# Altium PCB Power_Embedded_Board.PcbDoc (part 3 of 3)
Units mil, origin at the board's own origin, x right, y up, seen from the top; angles counter-clockwise.
Board outline 8055 x 2985 mil, 4 copper layers (Top Layer, Ground, Battery Voltage, Bottom Layer), stack 30.634 mil thick; 155 components, 174 nets, 698 pads, 170 vias.
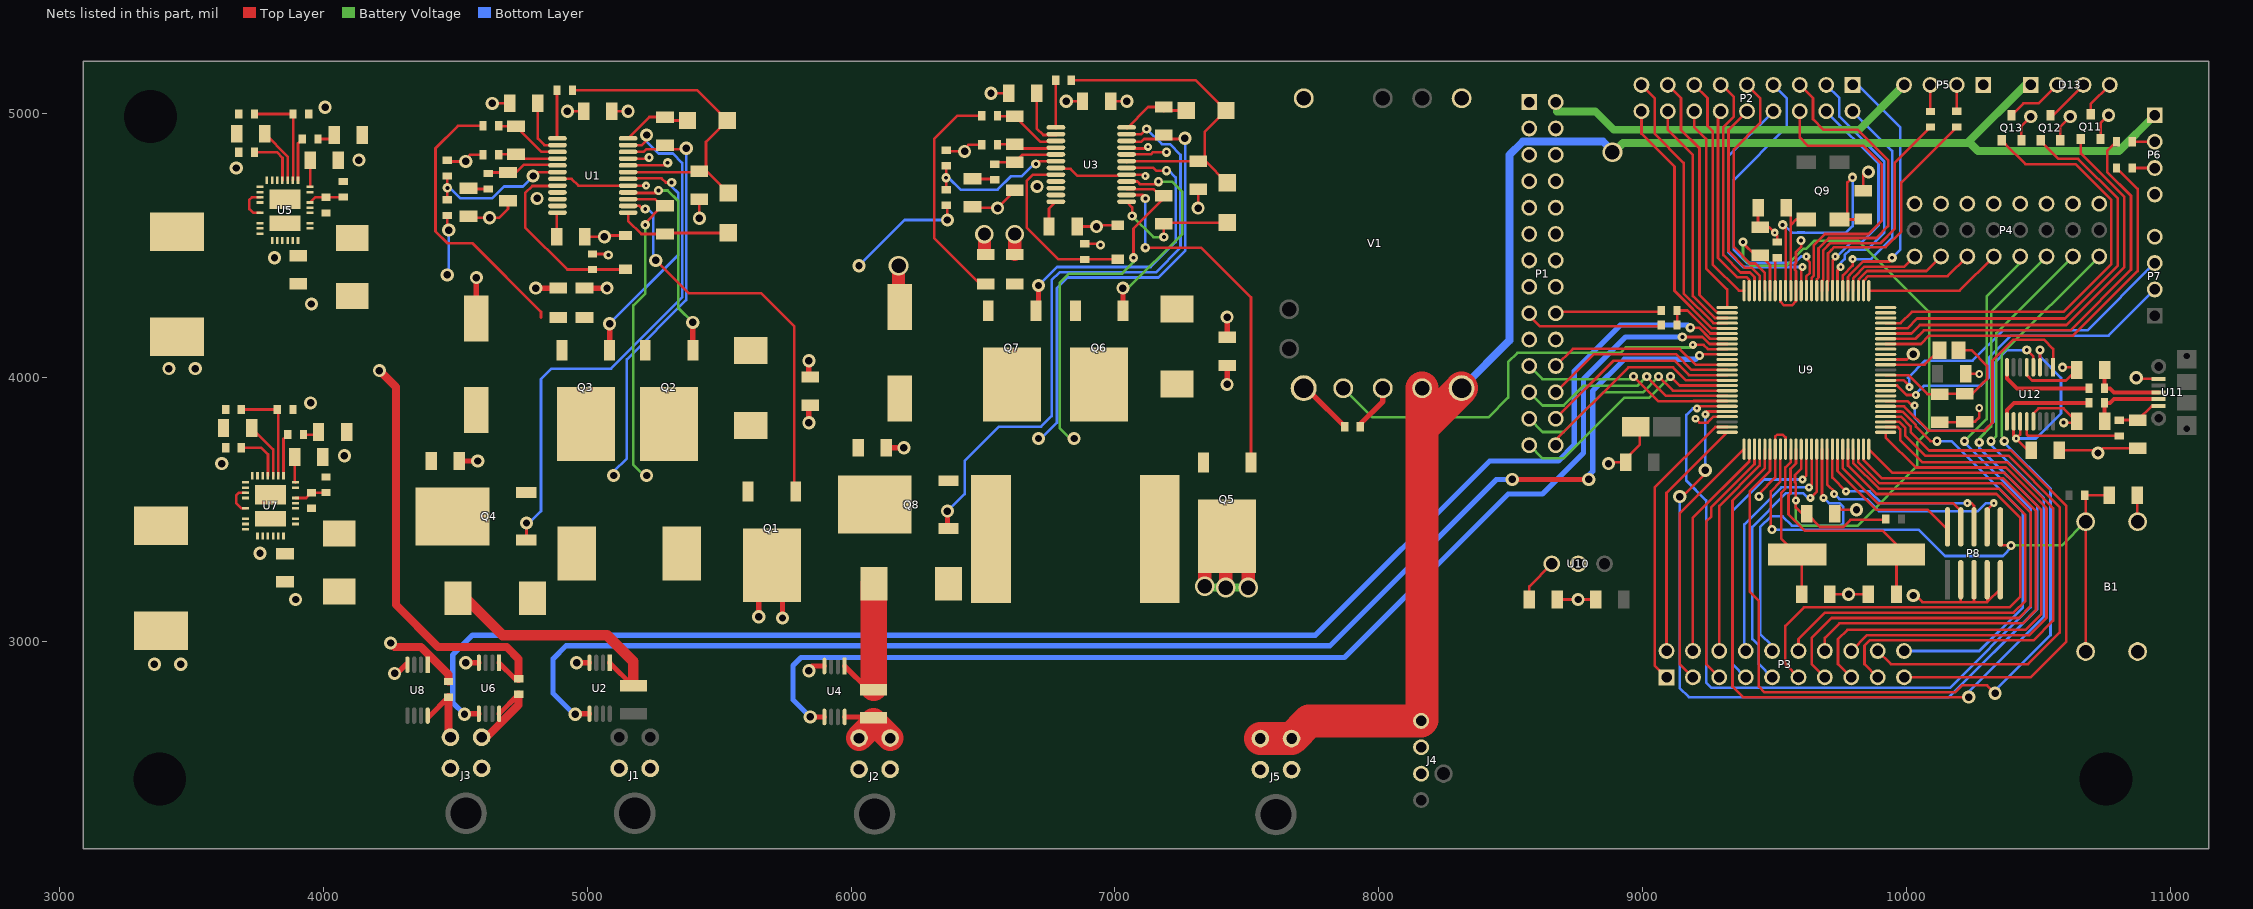
[diagram p4: the nets of this part, all layers, seen from the top]

## Via types
v1: diameter 50, hole 28, Top Layer to Bottom Layer, 89 vias
v2: diameter 35, hole 15, Top Layer to Bottom Layer, 45 vias
v3: diameter 30, hole 10, Top Layer to Bottom Layer, 26 vias
v4: diameter 75, hole 55, Top Layer to Bottom Layer, 5 vias
v5: diameter 30, hole 15, Top Layer to Bottom Layer, 2 vias
v6: diameter 70, hole 50, Top Layer to Bottom Layer, 2 vias
v7: diameter 34, hole 14, Top Layer to Bottom Layer, 1 vias

## Nets (pads, with @x,y where several pads share a name; then routed paths per layer and width w, separated by ;. In a path a pad name is that pad's centre, name@x,y a point inside that pad or via, vN(x,y) a via of type N, cw(c..) or ccw(c..) an arc to the next point about the centre after c; other vN are vias at no path point) (continued)
12V: D13.1 J4.4 J5.3 J5.4 P6.1 V1.7 V1.8 | length 5986.3
  Top Layer w10: J4.4@8159.96,2700 J4.4@8163.94,2703.98 ; 8163.94,3810 8163.94,3811.18
  Top Layer w125: J5.4@7550.94,2633.19 J5.3@7669.06,2633.19 7735.87,2700 J4.4@8159.96,2700 ; J4.4@8163.94,2703.98 8163.94,3810 ; V1.7@8163.94,3960.79 8163.94,3811.18 V1.8@8313.54,3960.79
  Battery Voltage w20: 10230,4890 10240,4890 ; D13.1@10450,5110 D13.1@10470,5110
  Battery Voltage w30: v4(8885,4855) 8885,4870 8895,4860 8925,4890 10230,4890 D13.1@10450,5110 ; 10240,4890 10270,4860 10805,4860 P6.1@10940,4995
  Bottom Layer w30: V1.8@8313.54,3960.79 8495,4142.24 8495,4845 8545,4895 8850,4895 8885,4860 v4(8885,4855)
19V: J2.3 J2.4 R19.2 U4.8 | length 299.6
  Top Layer w10: R19.2@6081.85,2715 R19.2@6085,2711.85 6085,2698.11 6085,2690
  Top Layer w20: U4.8@5975.59,2715 R19.2@6081.85,2715
  Top Layer w100: J2.4@6030,2635 6085,2690 ; R19.2@6085,2698.11 J2.3@6148.11,2635
48V1: J3.3 R28.2 U6.8 | length 335.2
  Top Layer w10: U6.8@4666.18,2727.09 U6.8@4666.61,2727.09
  Top Layer w20: U6.8@4666.61,2727.09 R28.2@4740,2800.47
  Top Layer w30: J3.3@4600,2638.11 4618.11,2638.11 4740,2760 R28.2@4740,2800.47
48V2: J3.4 R35.2 U8.8 | length 265.2
  Top Layer w10: J3.4@4474.41,2645.59 J3.4@4481.89,2638.11 J3.4@4481.89,2643.11
  Top Layer w20: U8.8@4400,2715.59 R35.2@4474.41,2790
  Top Layer w30: J3.4@4474.41,2645.59 R35.2@4474.41,2790
BG1-9V: Q3.G U1.18 | length 926.3
  Top Layer w10: Q3.G@5085,4104.69 Q3.G@5085.16,4104.53 ; U1.18@5155,4753.82 5157.41,4756.23 5281.91,4756.23 5298.13,4740 v2(5320,4740)
  Top Layer w20: Q3.G@5085,4104.69 v1(5085,4205)
  Bottom Layer w10: v1(5085,4205) 5345,4465 5345,4700 5320,4725 v2(5320,4740)
BG1-19V: Q7.G U3.18 | length 1138.4
  Top Layer w10: Q7.G@6700.16,4253.98 Q7.G@6710,4263.82 ; U3.18@7043.86,4795.43 7145.43,4795.43 7155.87,4785 v2(7195,4785)
  Top Layer w20: Q7.G@6710,4263.82 v1(6710,4350)
  Bottom Layer w10: v1(6710,4350) 6780,4420 7135,4420 7230,4515 7230,4760 7200,4790 v2(7195,4785)
BG2-9V: Q2.G U1.16 | length 819.5
  Top Layer w10: U1.16@5155,4702.64 5157.41,4700.23 5260.23,4700.23 v2(5270,4710) v2@5275.46,4710 ; Q2.G@5400,4104.69 Q2.G@5400.16,4104.53
  Top Layer w20: Q2.G@5400,4104.69 v1(5400,4210)
  Battery Voltage w10: v2(5270,4710) 5305,4710 5345,4670 5345,4265 v1(5400,4210) v1@5410,4220
BG2-19V: Q6.G U3.16 | length 790.9
  Top Layer w10: Q6.G@7030,4254.69 Q6.G@7030.16,4254.53 ; U3.16@7043.86,4744.25 7085,4744.25 7095.73,4733.52 7155.29,4733.52 v2(7165,4743.23)
  Top Layer w20: Q6.G@7030,4254.69 v1(7030,4340)
  Battery Voltage w10: v1(7030,4340) 7050,4340 7255,4545 7255,4705 7216.77,4743.23 v2(7165,4743.23)
DCOR: R41.1 U9.44 | length 128.6
  Top Layer w10: U9.44@9501.89,4330.2 9501.89,4447.36 R41.1@9510,4455.47
GND: B1.1 B1.2 C1.1 C2.1 C3.1 C4.1 C5.1 C6.1 C7.1 C11.1 C12.2 C13.1 C14.1 C15.1 C16.1 C17.1 C18.1 C19.1 C23.1 C24.2 C25.1 C26.1 C27.1 C28.1 C29.1 C30.1 C31.1 C32.1 C33.1 C34.1 C35.1 C36.1 C37.2 C38.2 C39.2 C40.2 C41.2 C42.1 C43.1 C44.1 C45.1 C46.1 C47.1 C48.1 C49.1 C50.1 D3.2 D8.2 J1.1 J1.2 J2.1 J2.2 J3.1 J3.2 J4.2 J4.3 J5.1 J5.2 P1.1 P1.3 P1.5 P1.7 P1.9 P1.11 P1.13 P1.15 P1.17 P1.19 P4.3 P4.6 P4.9 P4.12 P4.15 P4.18 P4.21 P4.24 P5.1 P6.4 P7.4 P8.3 P8.5 P8.7 P8.9 Q11.S Q12.S Q13.S R4.2 R5.1 R6.1 R10.1 R11.2 R15.2 R16.1 R17.1 R21.1 R23.1 R24.1 R27.1 R30.1 R31.1 R34.1 R41.2 R47.1 U1.7 U1.9 U1.10 U1.11 U1.17 U1.20 U2.4 U3.7 U3.9 U3.10 U3.11 U3.17 U3.20 U4.4 U5.1 U5.2 U5.4 U5.10 U5.12 U5.13 U5.14 U5.15 U5.16 U5.17 U5.23 U5.24 U5.34 U5.35 U5.36 U5.37 U6.4 U7.1 U7.2 U7.4 U7.10 U7.12 U7.13 U7.14 U7.15 U7.16 U7.17 U7.23 U7.24 U7.34 U7.35 U7.36 U7.37 U8.4 U9.15 U9.40 U9.43 U9.72 U9.82 U9.84 U10.2 U11.5 U12.5 U12.13 V1.3 V1.4 | length 8377.7
  Top Layer w10: R10.1@4470,4824.06 4474.06,4820 v1(4540,4820) 4540,4830 4555,4845 R4.2@4605.47,4845 ; C3.1@4550,4606.85 v1(4630,4606.85) 4666.85,4606.85 4700,4640 C4.1@4700,4671.85 ; v1(4640,5040) C6.1@4706.85,5040 ; U1.7@4887.28,4753.82 4941.18,4753.82 4966.77,4728.23 U1.17@5155,4728.23 v3(5223.23,4728.23) ; v1(4925,5010) C2.1@4986.85,5010 ; C7.1@4991.3,4535 v1(5065,4535) 5069.37,4539.37 D3.2@5145,4539.37 ; U1.20@5155,4805 5305,4805 v2(5305,4815) ; v1(5425,4605) C5.1@5425,4676.85 ; v1(5840,2890) 5840,2895.83 v1@5852.09,2907.91 ; C1.1@5845,4003.15 C1.1@5850,3998.15 ; C24.2@6180,4273.23 C24.2@6185,4268.23 ; R21.1@6360,4862.28 6364.06,4858.23 v1(6430,4858.23) 6430,4868.23 6445,4883.23 R15.2@6495.47,4883.23 ; C15.1@6475,4645.08 6553.15,4645.08 v1(6555,4643.23) 6620,4708.23 C16.1@6620,4710.08 ; R16.1@6505,4472.2 R16.1@6510,4467.2 ; v1(6530,5078.23) C18.1@6596.85,5078.23 ; U3.7@6777.28,4792.05 6831.18,4792.05 6856.77,4766.46 7040.47,4766.46 U3.17@7043.86,4769.84 7109.84,4769.84 v3(7115,4764.68) ; v1(6815,5048.23) C14.1@6876.85,5048.23 ; C19.1@6856.3,4573.23 v1(6930,4573.23) 6934.37,4577.6 D8.2@7010,4577.6 ; U3.20@7045,4843.23 7048.77,4847 7136.6,4847 7144.6,4855 v2(7195,4855) ; v1(7315,4643.23) C17.1@7315,4715.08 ; V1.4@7750.12,3965.35 V1.4@7750.12,3985.79 ; P1.17@8565,4240 8610,4195 R47.1@9070.47,4195 ; C44.1@8676.3,3160 v1(8755,3160) C45.1@8821.85,3160 ; v1(8870,3675) 8875,3680 C39.2@8921.85,3680 ; C39.2@8935,3680 C39.2@8921.85,3680 ; C41.2@8988.86,3835 8988.86,3747.01 C39.2@8921.85,3680 ; v3(9200,3845) 9215,3830 9245,3830 9267.83,3852.83 U9.72@9319.8,3852.83 ; C33.1@9436.85,4645 9436.85,4579.45 C38.2@9445,4571.3 9478.7,4571.3 v3(9500,4550) 9510,4540 R41.2@9510,4514.53 ; v2(9440,3550) 9440,3560 9501.89,3621.89 U9.82@9501.89,3729.8 9501.89,3776.89 9510,3785 9530,3785 9541.26,3773.74 U9.84@9541.26,3729.8 ; U9.43@9521.57,4330.2 9521.57,4288.43 9535,4275 9565,4275 9580.63,4290.63 U9.40@9580.63,4330.2 9580.63,4404.77 9577,4408.4 9577,4431.6 9580.63,4435.23 9580.63,4475.99 9600,4495.36 v2(9600,4520) ; C35.1@9708.15,3180 v1(9780,3180) C36.1@9855,3180 ; C37.2@9728.15,3485 9748.15,3505 9753.15,3500 v1(9810,3500) ; C34.1@9835,4708.15 9835,4770 9845,4780 v1(9855,4780) ; U9.15@9920.2,4069.37 10000.63,4069.37 10021.26,4090 v1(10025,4090) ; v1(10025,3175) 10035,3175 10060,3150 10205,3150 ; C42.1@10125,3831.85 10218.15,3831.85 C43.1@10220,3833.7 10258.7,3833.7 10275,3850 v5(10275,3885) ; P8.3@10205,3225 10205,3150 ; C40.2@10223.15,4015 v5(10275,4015) ; P8.5@10255,3225 10255,3150 ; P8.7@10305,3225 10305,3150 ; P8.9@10355,3225 10355,3200 10305,3150 ; Q13.S@10434.8,4900 10434.8,4954.8 v1(10470,4990) ; U12.5@10455,4040 10455,4010 10475,3990 10603.7,3990 C47.1@10643.7,4030 10633.7,4040 v2(10590,4040) ; U12.13@10480,3835 10480,3865 10499.5,3884.5 10594.2,3884.5 C48.1@10643.7,3835 10638.7,3830 v2(10595,3830) ; C49.1@10578.15,3725 10715,3725 v1(10725,3715) 10743.7,3733.7 C46.1@10875,3733.7 ; Q12.S@10582.4,4900.51 10582.4,4952.4 v1(10620,4990) ; Q11.S@10734.8,4905 10734.8,4964.8 v1(10765,4995) ; v1(10870,4000) 10873.82,3996.18 U11.5@10955,3996.18 ; C50.1@10873.15,3555 10873.15,3456.85 B1.1@10875,3455 ; 10205,3150 10255,3150 ; 10255,3150 10305,3150
  Top Layer w20: v1(4270,2880) 4270,2870 U8.4@4315,2915 ; C11.1@4515,3685 v1(4585,3685) ; v1(4540,2920) U6.4@4589.41,2920 ; C12.2@4580,4225 v1(4580,4380) ; v1(4805,4340) 4888.9,4340 R5.1@4890,4341.1 ; v1(4960,2920) U2.4@5008.82,2920 ; R6.1@4990,4341.1 4991.1,4340 v1(5075,4340) ; v1(5840,4065) 5840,4008.15 C1.1@5845,4003.15 ; v1@5852.09,2907.91 U4.4@5898.82,2907.91 ; C23.1@6133.15,3735 v1(6200,3735) ; C13.1@7425,4153.15 v1(7425,4230) ; V1.4@7745.12,3940.35 R11.2@7870.47,3815
  Top Layer w50: C24.2@6180,4273.23 v4(6180,4425) ; R16.1@6505,4472.2 v6(6505,4545) ; R17.1@6620,4467.2 v6(6620,4545)
  other v1: 3760,3335 3615,3675 4080,3705 3815,4455 4810,4680 6705,4725 3670,4795 4135,4825
NetC3_2: C3.2 R1.1 | length 75
  Top Layer w10: C3.2@4550,4715.47 R1.1@4625,4715.47
NetC4_2: C4.2 R1.2 U1.5 | length 275.4
  Top Layer w10: R1.2@4625,4778.15 C4.2@4700,4778.15 4730,4778.15 4759.26,4807.41 4884.87,4807.41 U1.5@4887.28,4805
NetC5_2: C5.2 D1.A D2.A R3.1 U1.19 | length 1273.3
  Top Layer w10: R3.1@4944.53,5090 5415.79,5090 D1.A@5530.79,4975 5450,4894.21 C5.2@5450,4783.15 ; U1.19@5155,4779.41 C5.2@5425,4779.41 ; C5.2@5425,4783.15 C5.2@5450,4783.15 ; D2.A@5535,4700.79 5452.64,4783.15 C5.2@5450,4783.15
NetC6_2: C6.2 U1.2 | length 217.7
  Top Layer w10: C6.2@4813.15,5040 4813.15,4906.85 4838.23,4881.77 U1.2@4887.28,4881.77
NetC7_2: C7.2 U1.12 | length 91.8
  Top Layer w10: C7.2@4885,4535 4885,4623.58 U1.12@4887.28,4625.87
NetC8_1: C8.1 D5.A L1.2 Q3.D Q4.S U1.22 | length 1579.6
  Top Layer w10: U1.22@5155,4856.18 5213.75,4856.18 5224.42,4866.85 5371.85,4866.85 v1(5375,4870)
  Bottom Layer w10: v1(5100,3630) 5100,3645 5150,3695 5150,4070 5375,4295 v1(5375,4870)
NetC8_2: C8.2 D1.K U1.24 | length 266.5
  Top Layer w10: U1.24@5155,4907.36 5235.79,4988.15 C8.2@5295,4988.15 5308.15,4975 D1.K@5380,4975 ; C8.2@5295,4973.15 C8.2@5296.85,4975
NetC9_1: C9.1 R4.1 U1.4 | length 230.3
  Top Layer w10: R4.1@4664.53,4845 4666.38,4846.85 C9.1@4730,4846.85 4746.26,4830.59 U1.4@4887.28,4830.59
NetC9_2: C9.2 R7.1 U1.3 | length 263.7
  Top Layer w10: R7.1@4664.53,4955 4666.38,4953.15 C9.2@4730,4953.15 4826.97,4856.18 U1.3@4887.28,4856.18
NetC10_1: C10.1 D4.K L1.1 Q1.S Q2.D U1.15 | length 1250.2
  Top Layer w10: U1.15@5155,4677.05 5256.1,4677.05 C10.1@5288.43,4644.72 ; v2(5220,4580) 5220,4586.3 5278.43,4644.72 C10.1@5288.43,4644.72 ; C10.1@5295,4651.3 C10.1@5288.43,4644.72
  Battery Voltage w10: v2(5220,4580) 5220,4320 5175,4275 5175,3670 5215,3630 v1(5225,3630)
NetC10_2: C10.2 D2.K U1.13 | length 442.1
  Top Layer w10: U1.13@5155,4625.87 5155,4595 5205,4545 C10.2@5295,4545 ; C10.2@5285,4548.7 5533.7,4548.7 D2.K@5535,4550
NetC11_2: C11.2 C12.1 D5.K Q4.D R8.1 R9.2 U2.1 | length 1219.5
  Top Layer w10: R9.2@4470,4615.47 4470,4565 v1(4475,4560) ; R8.1@5172.44,2833.15 R8.1@5175,2835.71
  Top Layer w20: U2.1@5085.59,2920 R8.1@5172.44,2833.15
  Top Layer w40: D5.K@4507.5,3182.5 4522.5,3182.5 4680,3025 5075,3025 5175,2925 R8.1@5175,2835.71
  Bottom Layer w10: v1(4470,4390) 4475,4395 v1(4475,4560)
NetC15_2: C15.2 R12.1 | length 76
  Top Layer w10: C15.2@6475,4751.38 6477.32,4753.7 R12.1@6550,4753.7
NetC16_2: C16.2 R12.2 U3.5 | length 241.9
  Top Layer w10: R12.2@6550,4812.76 6553.62,4816.38 C16.2@6620,4816.38 6649.26,4845.64 6774.87,4845.64 U3.5@6777.28,4843.23
NetC17_2: C17.2 D6.A D7.A R14.1 U3.19 | length 1275.7
  Top Layer w10: R14.1@6834.53,5128.23 7305.79,5128.23 D6.A@7420.79,5013.23 7340,4932.44 C17.2@7340,4821.38 ; U3.19@7045,4817.64 7047.59,4820.23 7206.6,4820.23 7206.87,4820.5 7312.14,4820.5 C17.2@7315,4817.64 ; C17.2@7315,4821.38 C17.2@7340,4821.38 ; D7.A@7425,4739.02 7342.64,4821.38 C17.2@7340,4821.38
NetC18_2: C18.2 U3.2 | length 217.7
  Top Layer w10: C18.2@6703.15,5078.23 6703.15,4945.08 6728.23,4920 U3.2@6777.28,4920
NetC19_2: C19.2 U3.12 | length 105.1
  Top Layer w10: C19.2@6750,4573.23 6750,4641.34 U3.12@6776.14,4667.48
NetC20_1: C20.1 D10.A L2.2 Q7.D Q8.S U3.22 | length 1802.6
  Top Layer w10: U3.22@7045,4894.41 7099.41,4894.41 7110.08,4905.08 7261.85,4905.08 v1(7265,4908.23)
  Bottom Layer w10: v1(6710,3770) 6720,3770 6780,3830 6780,4340 6820,4380 7165,4380 7266,4481 7266,4907.23 v1(7265,4908.23)
NetC20_2: C20.2 D6.K U3.24 | length 266.5
  Top Layer w10: U3.24@7045,4945.59 7125.79,5026.38 C20.2@7185,5026.38 7198.15,5013.23 D6.K@7270,5013.23 ; C20.2@7185,5011.38 C20.2@7186.85,5013.23
NetC21_1: C21.1 R15.1 U3.4 | length 230.3
  Top Layer w10: R15.1@6554.53,4883.23 6556.38,4885.08 C21.1@6620,4885.08 6636.26,4868.82 U3.4@6777.28,4868.82
NetC21_2: C21.2 R18.1 U3.3 | length 263.7
  Top Layer w10: R18.1@6554.53,4993.23 6556.38,4991.38 C21.2@6620,4991.38 6716.97,4894.41 U3.3@6777.28,4894.41
NetC22_1: C22.1 D9.K L2.1 Q5.S Q6.D U3.15 | length 1379.7
  Top Layer w10: U3.15@7045,4715.28 7146.1,4715.28 C22.1@7178.43,4682.95 ; v2(7070,4455) 7070,4565 7178.43,4673.43 C22.1@7178.43,4682.95 ; C22.1@7185,4689.53 C22.1@7178.43,4682.95
  Battery Voltage w10: v1(6845,3770) 6830,3770 6790,3810 6790,4360 6825,4395 7026.77,4395 7070,4438.23 v2(7070,4455)
NetC22_2: C22.2 D7.K U3.13 | length 508.2
  Top Layer w10: U3.13@7043.86,4667.48 7065,4646.34 v2(7065,4613.23) ; v2(7185,4533.23) C22.2@7185,4583.23 7190,4588.23 D7.K@7425,4588.23
  Battery Voltage w10: v2(7065,4613.23) 7145,4533.23 v2(7185,4533.23)
NetC23_2: C23.2 C24.1 D10.K Q8.D R19.1 R20.2 U4.1 | length 1005.9
  Top Layer w10: R19.1@6065.35,2818.15 R19.1@6085,2818.15 ; R20.2@6360,4653.7 6365,4648.7 v1(6365,4598.23)
  Top Layer w20: U4.1@5975.59,2907.91 R19.1@6065.35,2818.15
  Top Layer w100: R19.1@6086.54,2825 D10.K@6086.54,3220
  Bottom Layer w10: v1(6030,4425) 6203.23,4598.23 v1(6365,4598.23)
NetC25_2: C25.2 R25.1 | length 68.5
  Top Layer w10: R25.1@3979.53,4905 4026.85,4905 C25.2@4041.85,4920
NetC26_2: C26.2 U5.32 | length 211.7
  Top Layer w10: C26.2@3778.15,4925 3864.84,4838.31 U5.32@3864.84,4749.17
NetC27_2: C27.2 U5.28 | length 101.6
  Top Layer w10: U5.28@3949.49,4723.58 3950,4724.09 C27.2@3950,4825
NetC28_2: C28.2 D11.2 R26.2 R28.1 U6.1 | length 1637.6
  Top Layer w10: R28.1@4726.65,2859.53 R28.1@4740,2859.53
  Top Layer w20: U6.1@4666.18,2920 R28.1@4726.65,2859.53
  Top Layer w30: v1(4212.5,4027.5) 4275,3965 4275,3140 4435,2980 4695,2980 4740,2935 R28.1@4740,2859.53
  other v1: 3955,4280 4006.87,5025
NetC29_2: C29.2 R32.1 | length 61.5
  Top Layer w10: R32.1@3924.53,3785 3971.85,3785 C29.2@3981.85,3795
NetC30_2: C30.2 U7.32 | length 214.7
  Top Layer w10: C30.2@3728.15,3810 3809.84,3728.31 U7.32@3809.84,3629.17
NetC31_2: C31.2 U7.28 | length 97.5
  Top Layer w10: C31.2@3891.85,3700 3891.85,3606.22 U7.28@3894.49,3603.58
NetC32_2: C32.2 D12.2 R33.2 R35.1 U8.1 | length 295.4
  Top Layer w30: v1(4255,2995) 4270,2980 4370,2980 4474.41,2875.59 R35.1@4474.41,2849.06
  other v1: 3895,3160 3951.87,3905
NetC37_1: C37.1 C38.1 R40.1 U9.45 U9.87 | length 3049.6
  Top Layer w10: v2(9380,4515) 9380,4510 9425,4465 C38.1@9445,4465 9482.2,4427.8 U9.45@9482.2,4330.2 ; U9.87@9600.32,3729.8 9600,3729.49 9600,3655 9577,3632 9577,3603.4 9580,3600.4 v3(9580,3535) 9580,3508.7 9621.85,3466.85 C37.1@9621.85,3485 9671.85,3435 9760,3435 9787,3462 9917.94,3462 R40.1@9920.94,3465
  Battery Voltage w10: v2(9380,4515) 9380,4455 9410,4425 9545.4,4425 9609.9,4489.5 9619.5,4489.5 9650,4520 9815,4520 10085.5,4249.5 10085.5,3800.5 10040,3755 10040,3665 9815,3440 9600,3440 9580,3460 v3(9580,3535)
NetC46_2: C46.2 R42.1 U11.1 | length 172.7
  Top Layer w10: R42.1@10805,3839.06 10805.94,3840 C46.2@10875,3840 10928.82,3893.82 U11.1@10955,3893.82
NetC49_2: C49.2 U12.3 U12.10 U12.11 | length 763.3
  Top Layer w10: U12.10@10405,3835 10405,3780 v3(10415,3770) ; U12.11@10430,3835 10430,3785 v3(10415,3770) ; C49.2@10471.85,3725 10460,3725 v3(10415,3770) ; U12.3@10505,4040 v2(10505,4105)
  Bottom Layer w10: v3(10415,3770) 10490,3770 10585,3865 10585,4000 10505,4080 v2(10505,4105)
NetD3_1: D3.1 R2.1 U1.8 | length 710.1
  Top Layer w10: U1.8@4887.28,4728.23 4886.06,4727 4792,4727 4765,4700 4765,4570 4924.53,4410.47 R2.1@5020,4410.47 5020.16,4410.63 D3.1@5145,4410.63
NetD4_A: D4.A Q2.S Q3.S R5.2 R6.2 R7.2 | length 1078.1
  Top Layer w10: R7.2@4605.47,4955 4510,4955 4425,4870 4425,4555 4470,4510 4565,4510 4825,4250 4825,4228.9
NetD8_1: D8.1 R13.1 U3.8 | length 691.7
  Top Layer w10: U3.8@6776.14,4769.84 6689.84,4769.84 6665,4745 6665,4570 6786.3,4448.7 R13.1@6885,4448.7 6885.16,4448.86 D8.1@7010,4448.86
NetD9_A: D9.A Q6.S Q7.S R16.2 R17.2 R18.2 | length 860.1
  Top Layer w10: R18.2@6495.47,4993.23 6403.23,4993.23 6315,4905 6315,4529 6489,4355 R16.2@6510,4355
NetD11_1: D11.1 L3.2 U5.8 U5.9 U5.20 U5.21 U5.38
NetD12_1: D12.1 L4.2 U7.8 U7.9 U7.20 U7.21 U7.38
NetD13_2: D13.2 Q13.D | length 220.4
  Top Layer w10: Q13.D@10397.4,4994.49 10442.91,5040 10500,5040 D13.2@10570,5110
NetD13_3: D13.3 Q12.D | length 172.6
  Top Layer w10: Q12.D@10545,4995 10555,4995 D13.3@10670,5110
NetD13_4: D13.4 Q11.D | length 140.6
  Top Layer w10: Q11.D@10697.4,4999.49 10697.4,5037.4 D13.4@10770,5110
NetP5_2: P5.2 R37.2 | length 100
  Top Layer w10: R37.2@10190,5010 P5.2@10190,5110
NetP5_3: P5.3 R36.2 | length 100.5
  Top Layer w10: R36.2@10090,5009.53 P5.3@10090,5110
NetP6_2: P6.2 R38.1 | length 85.5
  Top Layer w10: R38.1@10854.53,4895 P6.2@10940,4895
NetP6_3: P6.3 R39.1 | length 85.5
  Top Layer w10: R39.1@10854.53,4795 P6.3@10940,4795
NetR3_2: R3.2 U1.1 | length 183.4
  Top Layer w10: R3.2@4885.47,5090 4885.47,4909.17 U1.1@4887.28,4907.36
NetR9_1: R9.1 R10.2 U1.6 | length 566.2
  Top Layer w10: R9.1@4470,4674.53 v2(4470,4720) R10.2@4470,4765 ; v1(4795,4765) 4796.18,4765 4810.59,4779.41 U1.6@4887.28,4779.41
  Bottom Layer w10: v2(4470,4720) 4480,4720 4520,4680 4640,4680 4685,4725 4756.18,4725 4795,4763.82 v1(4795,4765)
NetR11_1: R11.1 V1.6 | length 193.3
  Top Layer w10: V1.6@8015,3931.46 V1.6@8044.33,3960.79
  Top Layer w20: R11.1@7929.53,3815 7929.53,3824.53 8015,3910 V1.6@8015,3931.46
NetR14_2: R14.2 U3.1 | length 183.4
  Top Layer w10: R14.2@6775.47,5128.23 6775.47,4947.4 U3.1@6777.28,4945.59
NetR20_1: R20.1 R21.2 U3.6 | length 579.5
  Top Layer w10: R20.1@6360,4707.76 v2(6360,4758.23) R21.2@6360,4803.7 ; v2(6700,4810) 6700,4817.05 6703.98,4821.02 U3.6@6776.14,4821.02
  Bottom Layer w10: v2(6360,4758.23) 6370,4758.23 6415,4713.23 6555,4713.23 6605,4763.23 6646.18,4763.23 6692.95,4810 v2(6700,4810)
NetR22_1: R22.1 R23.2 U5.25 | length 134
  Top Layer w10: U5.25@3949.49,4664.53 3969.02,4684.06 R23.2@4010,4684.06 4074.06,4684.06 R22.1@4075,4685
NetR24_2: R24.2 U5.33 | length 199.6
  Top Layer w10: R24.2@3739.06,4855 3824.11,4855 3845.16,4833.95 U5.33@3845.16,4749.17
NetR25_2: R25.2 U5.30 | length 162.6
  Top Layer w10: U5.30@3904.21,4749.17 3904.21,4888.74 R25.2@3920.47,4905
NetR26_1: R26.1 R27.2 U5.31 | length 397.6
  Top Layer w10: R27.2@3739.06,5000 R26.1@3885.47,5000 3885.47,4750.12 U5.31@3884.53,4749.17
NetR29_1: R29.1 R30.2 U7.25 | length 124.2
  Top Layer w10: U7.25@3894.49,3544.53 3935,3544.53 R30.2@3955,3564.53 4009.05,3564.53 R29.1@4010,3565.47
NetR31_2: R31.2 U7.33 | length 191.7
  Top Layer w10: R31.2@3689.53,3735 3765,3735 3790.16,3709.84 U7.33@3790.16,3629.17
NetR32_2: R32.2 U7.30 | length 162.6
  Top Layer w10: U7.30@3849.21,3629.17 3849.21,3768.74 R32.2@3865.47,3785
NetR33_1: R33.1 R34.2 U7.31 | length 388.7
  Top Layer w10: R34.2@3689.53,3880 R33.1@3825.94,3880 3829.53,3876.42 U7.31@3829.53,3629.17
NetR42_2: R42.2 U12.12 | length 402.1
  Top Layer w10: U12.12@10455,3835 10455,3785 10460,3780 R42.2@10805,3780
NetR46_1: R46.1 R47.2 U9.56 | length 285.9
  Top Layer w10: R47.2@9130,4195 9130,4200 9130,4255 9168.64,4255 9255.84,4167.8 U9.56@9319.8,4167.8
NetU5_3: U5.3 U5.6 | length 126
  Top Layer w10: U5.6@3760.51,4625.16 3734.84,4625.16 3720,4640 3720,4675 3729.21,4684.21 U5.3@3760.51,4684.21
NetU7_3: U7.3 U7.6 | length 113.1
  Top Layer w10: U7.6@3705.51,3505.16 3689.84,3505.16 3670,3525 3670,3555 3679.21,3564.21 U7.3@3705.51,3564.21
P1.0: P3.19 U9.4 | length 2023.3
  Top Layer w10: U9.4@9920.2,3852.83 9978.08,3852.83 10015,3815.91 10015,3795 10085.5,3724.5 10347.63,3724.5 10348.13,3725 10395,3725 10605,3515 10605,3000 10470,2865 P3.19@9990,2865
P1.1: P3.20 U9.5 | length 1560.3
  Top Layer w10: U9.5@9920.2,3872.52 9977.48,3872.52 9979.17,3870.83 9985.53,3870.83 10035,3821.37 10035,3815 10090,3760 v2(10115,3760)
  Bottom Layer w10: P3.20@9990,2965 10275,2965 10440,3130 10440,3490 10170,3760 v2(10115,3760)
P1.2_UART0_RXD: U9.6 U12.1 | length 1038.1
  Top Layer w10: U9.6@9920.2,3892.2 9989.62,3892.2 10081.82,3800 10295,3800 10325,3830 10325,4065 10405,4145 10520,4145 10555,4110 U12.1@10555,4040
P1.3_UART0_TXD: U9.7 U12.4 | length 938.1
  Top Layer w10: U9.7@9920.2,3911.89 10003.11,3911.89 10020,3895 v3(10030,3895) ; v2(10455,4105) 10480,4080 U12.4@10480,4040
  Bottom Layer w10: v3(10030,3895) 10030,3850 10080,3800 10295,3800 10330,3835 10330,4055 10380,4105 v2(10455,4105)
P1.4: U9.8
P1.5: U9.9
P1.6_UCB0_SDA: P7.2 U9.10 | length 1247.2
  Top Layer w10: U9.10@9920.2,3970.94 9964.06,3970.94 10000,3935 v3(10035,3935)
  Bottom Layer w10: v3(10035,3935) 10035,3940 10065,3970 10280,3970 10310,4000 10310,4075 10395,4160 10765,4160 P7.2@10940,4335
P1.7_UCB0_SCL: P7.3 U9.11 | length 1255.6
  Top Layer w10: U9.11@9920.2,3990.63 9989.37,3990.63 10010,3970 v3(10010,3965)
  Bottom Layer w10: v3(10010,3965) 10010,3995 10005,4000 10070,4065 10250,4065 10365,4180 10685,4180 P7.3@10940,4435
P2.0: U9.16
P2.1: U9.17
P2.2_UART1_RXD: R39.2 U9.18 | length 1492.3
  Top Layer w10: U9.18@9920.2,4128.43 10053.43,4128.43 10085,4160 10630,4160 10875,4405 10875,4715.47 R39.2@10795.47,4795
P2.3_UART1_TXD: R38.2 U9.19 | length 1575.3
  Top Layer w10: U9.19@9920.2,4148.11 10033.11,4148.11 10065,4180 10620,4180 10850,4410 10850,4690 10760,4780 10760,4859.53 R38.2@10795.47,4895
P2.4_LED_RED: Q11.G U9.20 | length 1562.6
  Top Layer w10: U9.20@9920.2,4167.8 10017.8,4167.8 10050,4200 10605,4200 10825,4420 10825,4685 10660,4850 Q11.G@10660,4905
P2.5_LED_GREEN: Q12.G U9.21 | length 1622.3
  Top Layer w10: U9.21@9920.2,4187.48 10002.48,4187.48 10040,4225 10600,4225 10800,4425 10800,4680 10650,4830 10575,4830 10513.64,4891.36 Q12.G@10513.64,4906.56
P2.6_LED_BLUE: Q13.G U9.22 | length 1679.1
  Top Layer w10: U9.22@9920.2,4207.17 9977.17,4207.17 10020,4250 10595,4250 10775,4430 10775,4675 10640,4810 10450,4810 Q13.G@10375,4885
P2.7: U9.23
P3.0: P2.3 U9.32 | length 969.5
  Top Layer w10: U9.32@9738.11,4330.2 9738.11,4408.11 v3@9740.99,4410.99
  Bottom Layer w10: P2.3@9695,5110 9745,5060 9745,4990 9915,4820 9915,4550 9850,4485 9785,4485 9765,4465 9765,4450 9750,4435 v3(9750,4420)
P3.1: P2.4 U9.33 | length 863.6
  Top Layer w10: U9.33@9718.43,4330.2 9720,4331.77 9720,4445 9732,4457 9730,4459 v3(9730,4460)
  Bottom Layer w10: P2.4@9695,5010 9893,4812 9893,4578 9830,4515 9790,4515 9733.26,4458.26 9731.52,4460 v3(9730,4460)
P3.2: R37.1 U9.34 | length 938.5
  Top Layer w10: U9.34@9698.74,4330.2 9700.43,4331.88 9700.43,4363.6 9702,4365.18 9702,4472 9715,4485 9715.4,4485 9725.4,4495 9920,4495 9980,4555 9980,4740.94 R37.1@10190,4950.94
P3.3: R36.1 U9.35 | length 901.8
  Top Layer w10: U9.35@9679.06,4330.2 9679.06,4367.69 9684,4372.63 9684,4484 9710,4510 9900,4510 9955,4565 9955,4815.47 R36.1@10090,4950.47
P3.4: P2.5 U9.36 | length 1212.3
  Top Layer w10: P2.5@9595,5110 9645,5060 9645,4980 9685,4940 9815,4940 9930,4825 9930,4575 9885,4530 9705,4530 9666,4491 9666,4380.09 9659.37,4373.46 U9.36@9659.37,4330.2
P3.5: P2.6 U9.37 | length 1137.8
  Top Layer w10: P2.6@9595,5010 9595,4910 9625,4880 9835,4880 9905,4810 9905,4595 9855,4545 9690,4545 9648,4503 9648,4387.54 9639.69,4379.23 U9.37@9639.69,4330.2
P3.6: P2.7 U9.38 | length 1189.3
  Top Layer w10: U9.38@9620,4330.2 9620,4385 9633,4398 9633,4437 9610,4460 v3(9620,4460)
  Bottom Layer w10: P2.7@9495,5110 9545,5060 9545,4950 9345,4750 9345,4485 9395,4435 9575,4435 9600,4460 v3(9620,4460)
P3.7: P2.8 U9.39 | length 999.9
  Top Layer w10: U9.39@9600.32,4330.2 9600.32,4415.31 v3(9605,4420)
  Bottom Layer w10: P2.8@9495,5010 9325,4840 9325,4475 9380,4420 v3(9605,4420)
P4.1_A12_48Vcur: U6.5 U9.57 | length 5832
  Top Layer w10: v1(4535,2725) v1@4537.09,2727.09 ; v2(9180,4190) 9212.43,4190 9254.32,4148.11 U9.57@9319.8,4148.11
  Top Layer w20: v1@4537.09,2727.09 U6.5@4589.41,2727.09
  Bottom Layer w20: v1(4535,2725) 4490,2770 4490,2950 4565,3025 7760,3025 8420,3685 8680,3685 8740,3745 8740,4025 8915,4200 9170,4200 v2(9180,4190)
P4.2_A11_19Vcur: U4.5 U9.58 | length 4506.3
  Top Layer w10: v2(9150,4155) 9226.21,4155 9252.79,4128.43 U9.58@9319.8,4128.43
  Top Layer w20: v1(5845,2715) U4.5@5898.82,2715
  Bottom Layer w20: v1(5845,2715) 5780,2780 5780,2910 5810,2940 7870,2940 8490,3560 8620,3560 8775,3715 8775,3995 8935,4155 v2(9150,4155)
P4.3_12V_PGood: U9.59 V1.5 | length 1700.8
  Top Layer w10: v3(9190,4125) 9230,4125 9246.26,4108.74 U9.59@9319.8,4108.74
  Battery Voltage w10: V1.5@7864.72,3960.79 7975.51,3850 8415,3850 8490,3925 8490,4060.18 8524.82,4095 8915,4095 8935,4115 9180,4115 v3(9190,4125)
P4.4_A9_9Vcur: U2.5 U9.60 | length 5422.2
  Top Layer w10: v1(4955,2725) v1@4957.09,2727.09 ; v2(9215,4085) 9219.06,4089.06 U9.60@9319.8,4089.06
  Top Layer w20: v1@4957.09,2727.09 U2.5@5008.82,2727.09 ; v1(8505,3615) 8785,3615 8790,3610 v1(8795,3615)
  Bottom Layer w10: v1@4950,2725 v1(4955,2725)
  Bottom Layer w20: v1@4950,2725 4870,2805 4870,2935 4920,2985 7815,2985 8445,3615 v1(8505,3615) ; v1(8795,3615) 8795,3630 8810,3645 8810,3950 8930,4070 9200,4070 v2(9215,4085)
P4.5_A8_3V3cur: U9.61
P4.6_A7_Motor8: P1.22 U9.62 | length 708.8
  Top Layer w10: P1.22@8665,4040 P1.22@8670,4045 8735,4110 9140,4110 9200.32,4049.68 U9.62@9319.8,4049.68
P4.7_A6_Motor7: P1.24 U9.63 | length 741.8
  Top Layer w10: P1.24@8665,3940 P1.24@8670,3945 8815,4090 9125,4090 9185,4030 U9.63@9319.8,4030
P5.0_A5_Motor6: P1.26 U9.64 | length 770.7
  Top Layer w10: P1.26@8665,3840 P1.26@8670,3845 8890,4065 9120,4065 9174.69,4010.31 U9.64@9319.8,4010.31
P5.1_A4_Motor5: P1.28 U9.65 | length 811.2
  Top Layer w10: P1.28@8665,3740 8665,3760 8945,4040 9115,4040 9164.37,3990.63 U9.65@9319.8,3990.63
P5.2_A3_Motor4: P1.27 U9.66 | length 913
  Top Layer w10: v2(9105,4005) 9139.06,3970.94 U9.66@9319.8,3970.94
  Battery Voltage w10: P1.27@8570,3745 8620,3695 8700,3695 8930,3925 9025,3925 v2(9105,4005)
P5.3_A2_Motor3: P1.25 U9.67 | length 879.8
  Top Layer w10: v2(9060,4005) 9113.74,3951.26 U9.67@9319.8,3951.26
  Battery Voltage w10: P1.25@8570,3845 8620,3795 8700,3795 8850,3945 9000,3945 v2(9060,4005)
P5.4_A1_Motor2: P1.23 U9.68 | length 846.5
  Top Layer w10: v2(9015,4005) 9088.43,3931.57 U9.68@9319.8,3931.57
  Battery Voltage w10: P1.23@8570,3945 8619.96,3895.04 8700.04,3895.04 8775,3970 8980,3970 v2(9015,4005)
P5.5_A0_Motor1: P1.21 U9.69 | length 813.7
  Top Layer w10: v2(8965,4005) 9058.11,3911.89 9192.88,3911.89 9193.4,3912.41 9319.28,3912.41 U9.69@9319.8,3911.89
  Battery Voltage w10: P1.21@8570,4045 8620,3995 8955,3995 v2(8965,4005)
P5.6_TA2.1: P4.13 U9.70 | length 4102.5
  Top Layer w10: v3(9205,3884.41) 9205,3890 9207.2,3892.2 U9.70@9319.8,3892.2
  Battery Voltage w10: v2(10219.51,3760) 10303,3843.49 10303,4308 10430,4435 P4.13@10430,4460
  Bottom Layer w10: v3(9205,3884.41) 9189.41,3884.41 9165,3860 9165,3610 9240,3535 9240,2845 9260,2825 10164,2825 10470,3131 10470,3505 10219.51,3755.49 v2(10219.51,3760)
P5.7_TA2.2: P4.16 U9.71 | length 4213.2
  Top Layer w10: v1(9140,3550) 9150,3550 9237.07,3637.07 v1(9237.07,3650) ; v3(9237.07,3861.67) 9237.07,3867.11 9242.48,3872.52 U9.71@9319.8,3872.52
  Battery Voltage w10: v2(10275,3755) 10275,3770 10320,3815 10320,4250 P4.16@10530,4460
  Bottom Layer w10: v1(9140,3550) 9140,2825 9175,2790 10160,2790 10495,3125 10495,3515 10275,3735 v2(10275,3755) ; v1(9237.07,3650) v3(9237.07,3861.67)
P6.0: P2.17 U9.54 | length 1067.6
  Top Layer w10: P2.17@8995,5110 9045,5060 9045,4925 9155,4815 9155,4320.34 9268.18,4207.17 U9.54@9319.8,4207.17
P6.1: P2.18 U9.55 | length 990.6
  Top Layer w10: P2.18@8995,5010 8995,4925 9120,4800 9120,4330 9262.52,4187.48 U9.55@9319.8,4187.48
P6.2: P3.3 U9.76 | length 986.5
  Top Layer w10: P3.3@9190,2865 9140,2915 9140,3486.02 U9.76@9383.78,3729.8
P6.3: P3.4 U9.77 | length 853.2
  Top Layer w10: P3.4@9190,2965 9190,3470 9403.46,3683.46 U9.77@9403.46,3729.8
P6.4: P3.5 U9.78 | length 961.4
  Top Layer w10: P3.5@9290,2865 9240,2915 9240,3455 9260,3475 9260,3510 9423.15,3673.15 U9.78@9423.15,3729.8
P6.5: P3.6 U9.79 | length 828.1
  Top Layer w10: P3.6@9290,2965 9290,3515 9442.83,3667.83 U9.79@9442.83,3729.8
P6.6_TA2.3: P4.19 U9.80 | length 3861.4
  Top Layer w10: U9.80@9462.52,3729.8 9462.52,3657.52 9340,3535 9340,2830 9380,2790 v1(10235,2790)
  Battery Voltage w10: v2(10320,3760) 10340,3780 10340,4170 P4.19@10630,4460
  Bottom Layer w10: v1(10235,2790) 10235,2810 10520,3095 10520,3545 10320,3745 v2(10320,3760)
P6.7_TA2.4: P4.22 U9.81 | length 3846.3
  Top Layer w10: U9.81@9482.2,3729.8 9482.2,3647.2 9405,3570 9405,3190 9440,3155 9440,2830 9462,2808 10183,2808 10210,2835 10305,2835 v1(10335,2805)
  Battery Voltage w10: v2(10370,3760) 10370,3769.59 10360,3779.59 10360,4090 P4.22@10730,4460
  Bottom Layer w10: v1(10335,2805) 10335,2815 10545,3025 10545,3580 10375,3750 10375.5,3750.5 10370,3756 v2(10370,3760)
P7.0: P3.7 U9.88 | length 1087.3
  Top Layer w10: v3(9605,3615) 9620,3630 9620,3727.8 9619,3728.8 U9.88@9620,3729.8
  Bottom Layer w10: P3.7@9390,2865 9340,2915 9340,3495 9460,3615 v3(9605,3615)
P7.1: P3.8 U9.89 | length 933.9
  Top Layer w10: v3(9630,3585) 9639.69,3594.69 U9.89@9639.69,3729.8
  Bottom Layer w10: P3.8@9390,2965 9385,2970 9385,3445 9525,3585 v3(9630,3585)
P7.2: P3.9 U9.90 | length 1080.6
  Top Layer w10: v3(9635,3545) 9659.37,3569.37 U9.90@9659.37,3729.8
  Bottom Layer w10: P3.9@9490,2865 9440,2915 9440,2985 9415,3010 9415,3435 9543,3563 9607,3563 9630,3540 v3(9635,3545)
P7.3: P3.10 U9.91 | length 1175.6
  Top Layer w10: U9.91@9679.06,3729.8 9679.06,3550.94 v3(9685,3545)
  Bottom Layer w10: P3.10@9490,2965 9490,2985 9445,3030 9445,3435 9485,3475 9530,3475 9565,3440 9750,3440 9760,3450 9760,3510 9745,3525 9705,3525 v3(9685,3545)
P7.4_TA1.4: P4.10 U9.26 | length 527.5
  Top Layer w10: U9.26@9856.22,4330.2 10200.2,4330.2 P4.10@10330,4460
P7.5_TA1.3: P4.7 U9.27 | length 469.1
  Top Layer w10: U9.27@9836.54,4330.2 9838,4331.66 9838,4368.92 9854.08,4385 10155,4385 P4.7@10230,4460
P7.6_TA1.2: P4.4 U9.28 | length 391.3
  Top Layer w10: U9.28@9816.85,4330.2 9818.54,4331.88 9818.54,4372.47 9820,4373.93 9820,4375 9850,4405 10075,4405 P4.4@10130,4460
P7.7_TA1.1: P4.1 U9.29 | length 314.4
  Top Layer w10: U9.29@9797.17,4330.2 9797.17,4376.56 9802,4381.39 9802,4382.46 9840.54,4421 9991,4421 P4.1@10030,4460
P8.0: P2.1 U9.30 | length 1007
  Top Layer w10: U9.30@9777.48,4330.2 9777.48,4382.33 9784,4388.85 9784,4389.91 9835.09,4441 9936,4441 9945,4450 v2(9945,4455)
  Bottom Layer w10: P2.1@9795,5110 9815,5110 9975,4950 9975,4485 v2(9945,4455)
P8.1: P2.2 U9.31 | length 860.5
  Top Layer w10: U9.31@9757.8,4330.2 9757.8,4387.8 9795,4425 v3(9795,4450)
  Bottom Layer w10: v3(9795,4450) 9865,4450 9945,4530 9945,4860 P2.2@9795,5010
P8.2: P2.9 U9.46 | length 902.3
  Top Layer w10: P2.9@9395,5110 9445,5060 9445,4965 9345,4865 9345,4495 9406.65,4433.35 9426.65,4433.35 9462.52,4397.48 U9.46@9462.52,4330.2
P8.3: P2.10 U9.47 | length 772.3
  Top Layer w10: P2.10@9395,5010 9325,4940 9325,4480 9388,4417 9413,4417 9442.83,4387.17 U9.47@9442.83,4330.2
P8.4: P2.11 U9.48 | length 889.5
  Top Layer w10: P2.11@9295,5110 9300,5110 9345,5065 9345,4990 9305,4950 9305,4465 9371,4399 9406,4399 9423.15,4381.85 U9.48@9423.15,4330.2
P8.5: P2.12 U9.49 | length 753.5
  Top Layer w10: P2.12@9295,5010 9285,5000 9285,4455 9359.45,4380.55 9394.45,4380.55 9403.46,4371.54 U9.49@9403.46,4330.2
P8.6: P2.13 U9.50 | length 869.1
  Top Layer w10: P2.13@9195,5110 9245,5060 9245,4955 9265,4935 9265,4430 9364.8,4330.2 U9.50@9383.78,4330.2
P8.7: P2.14 U9.51 | length 795.5
  Top Layer w10: P2.14@9195,5010 9195,4950 9240,4905 9240,4415 9319.8,4335.2 U9.51@9319.8,4266.22
P9.0: P2.15 U9.52 | length 978.4
  Top Layer w10: P2.15@9095,5110 9145,5060 9145,4940 9215,4870 9215,4314.08 9278.77,4250.31 9279.69,4250.31 9283.46,4246.54 U9.52@9319.8,4246.54
P9.1: P2.16 U9.53 | length 903.6
  Top Layer w10: P2.16@9095,5010 9095,4940 9190,4845 9190,4310 9273.15,4226.85 U9.53@9319.8,4226.85
P9.2: P3.1 U9.74 | length 1107.4
  Top Layer w10: P3.1@9090,2865 9045,2910 9045,3583.79 9274.68,3813.46 U9.74@9319.8,3813.46
P9.3: P3.2 U9.75 | length 924
  Top Layer w10: P3.2@9090,2965 9090,3563.98 U9.75@9319.8,3793.78
P9.4: P3.11 U9.96 | length 2248.3
  Top Layer w10: P3.11@9590,2865 9540,2915 9540,3060 9610,3130 10390,3130 10430.5,3170.5 10430.5,3469.5 10340,3560 9885,3560 9777.48,3667.52 U9.96@9777.48,3729.8
P9.5: P3.12 U9.97 | length 2076.8
  Top Layer w10: P3.12@9590,2965 9590,3010 9690,3110 10405,3110 10450,3155 10450,3480 10350,3580 9895,3580 9797.17,3677.83 U9.97@9797.17,3729.8
P9.6: P3.13 U9.98 | length 2187.1
  Top Layer w10: P3.13@9690,2865 9640,2915 9640,3015 9715,3090 10425,3090 10470,3135 10470,3490 10360,3600 9896.78,3600 9816.85,3679.93 U9.98@9816.85,3729.8
P9.7: P3.14 U9.99 | length 2043.4
  Top Layer w10: P3.14@9690,2965 9690,3015 9745,3070 10440,3070 10490,3120 10490,3495 10365,3620 9905,3620 9836.54,3688.46 U9.99@9836.54,3729.8
P10.0: P3.15 U9.100 | length 2119.3
  Top Layer w10: P3.15@9790,2865 9740,2915 9740,3010 9775,3045 10450,3045 10510,3105 10510,3500 10508,3502 10508,3502.46 10370.46,3640 9946.02,3640 U9.100@9856.22,3729.8
P10.1: P3.16 U9.1 | length 1947.8
  Top Layer w10: P3.16@9790,2965 9850,3025 10465,3025 10530,3090 10530,3505 10528,3507 10528,3507.91 10375.91,3660 10035,3660 9920.2,3774.8 U9.1@9920.2,3793.78
P10.2: P3.17 U9.2 | length 2106.9
  Top Layer w10: P3.17@9890,2865 9840,2915 9840,2985 9860,3005 10480,3005 10555,3080 10555,3505 10548,3512 10548,3513.37 10381.37,3680 10060,3680 9975,3765 9975,3805 9966.54,3813.46 U9.2@9920.2,3813.46
P10.3: P3.18 U9.3 | length 2046.9
  Top Layer w10: P3.18@9890,2965 9940,2915 10460,2915 10580,3035 10580,3510 10385,3705 10070,3705 9995,3780 9995,3810.46 9972.31,3833.15 U9.3@9920.2,3833.15
P10.4: U9.24
P10.5: U9.25
PJ.0_LFXIN: C33.2 Q9.4 U9.41 | length 388.5
  Top Layer w10: C33.2@9543.15,4645 9560.94,4627.2 9560.94,4580 ; U9.41@9560.94,4330.2 9560.94,4580 ; Q9.4@9619.02,4600 9580.94,4600 9560.94,4580
PJ.1_LFXOUT: C34.2 Q9.1 U9.42 | length 989.6
  Top Layer w10: v2(9530,4580) 9535,4580 9541.26,4573.74 U9.42@9541.26,4330.2 ; Q9.1@9745,4600 Q9.1@9775,4600 ; v2(9795,4760) 9775,4740 Q9.1@9775,4600 ; C34.2@9835,4601.85 9833.15,4600 Q9.1@9775,4600
  Bottom Layer w10: v2(9530,4580) 9535,4580 9565,4550 9586.87,4550 9587.37,4550.5 9612.63,4550.5 9613.13,4550 9770,4550 9795,4575 v2(9795,4760)
PJ.2_HFXOUT: C35.2 Q10.2 U9.85 | length 596.5
  Top Layer w10: U9.85@9560.94,3729.8 9560.94,3680.94 9540,3660 9540,3580 9525,3565 9525,3390 Q10.2@9585,3330 9601.85,3313.15 C35.2@9601.85,3180
PJ.3_HFXIN: C36.2 Q10.1 U9.86 | length 904
  Top Layer w10: U9.86@9580.63,3729.8 9580.63,3675.63 9560,3655 9560,3563 9552,3555 9552,3483 9615,3420 9910,3420 9959.02,3370.98 Q10.1@9959.02,3330 9961.3,3327.72 C36.2@9961.3,3180
RST: B1.3 B1.4 C50.2 P8.10 R45.1 U9.83 | length 2405.5
  Top Layer w10: v2(9490,3425) 9485,3430 9485,3570 9521.57,3606.57 U9.83@9521.57,3729.8 ; P8.10@10355,3425 10355,3375 10350,3370 10355,3365 v2(10395,3365) ; B1.4@10678.15,2962.87 B1.3@10678.15,3455 10678.15,3551.38 R45.1@10674.53,3555 C50.2@10766.85,3555
  Battery Voltage w10: v2(10395,3365) 10588.15,3365 B1.3@10678.15,3455
  Bottom Layer w10: v2(9490,3425) 10045,3425 10145,3325 10365,3325 10400,3360 v2(10395,3365)
TCK_SWDCLK: P8.4 U9.95 | length 657
  Top Layer w10: U9.95@9757.8,3729.8 9757.8,3657.2 9890,3525 10175,3525 10205,3495 P8.4@10205,3435 P8.4@10205,3425
TDI: P8.8 U9.92 | length 939.5
  Top Layer w10: U9.92@9698.74,3729.8 9698.74,3596.26 9730,3565 v3(9725,3560) ; P8.8@10305,3425 P8.8@10305,3435 10305,3500 v3(10330,3525)
  Bottom Layer w10: v3(9725,3560) 9745,3540 9850,3540 9895,3495 10270,3495 10300,3525 v3(10330,3525)
TDO_SWO: P8.6 U9.93 | length 778.9
  Top Layer w10: U9.93@9718.43,3729.8 9718.43,3621.57 v3(9770,3570) ; v3(10230,3525) 10245,3525 10255,3515 P8.6@10255,3435 P8.6@10255,3425
  Bottom Layer w10: v3(9770,3570) 9860,3570 9905,3525 v3(10230,3525)
TG1-9V: Q4.G U1.23 | length 2121.6
  Top Layer w10: Q4.G@4768.98,3384.84 4770,3385.87 v1(4770,3450) ; U1.23@5155,4881.77 5206.77,4881.77 5230,4905 5225,4910 v1(5225,4920)
  Bottom Layer w10: v1(4770,3450) 4770,3440 4825,3495 4825,3995 4865,4035 5090,4035 5360,4305 5360,4815 5325,4850 5270,4850 5225,4895 v1(5225,4920)
TG1-19V: Q8.G U3.23 | length 2353.2
  Top Layer w10: Q8.G@6365,3433.82 Q8.G@6368.98,3429.84 ; U3.23@7043.86,4923.39 7100.16,4923.39 v2(7120,4943.23)
  Top Layer w20: Q8.G@6365,3433.82 v1(6365,3495)
  Bottom Layer w10: v1@6365,3505 v1(6365,3495) 6430,3560 6430,3685 6560,3815 6720,3815 6760,3855 6760,4370 6790,4400 7155,4400 7248,4493 7248,4845.13 7207.63,4885.5 7177.73,4885.5 v2(7120,4943.23)
TG2-9V: Q1.G U1.14 | length 1543.7
  Top Layer w10: U1.14@5155,4651.46 5198.54,4651.46 5210,4640 v2(5220,4640) ; v1(5260,4445) 5385,4320 5660,4320 5785,4195 5785,3574.69 Q1.G@5790.16,3569.53
  Bottom Layer w10: v2(5220,4640) 5230,4640 5250.5,4619.5 5250.5,4567.37 5250,4566.87 5250,4455 v1(5260,4445)
TG2-19V: Q5.G U3.14 | length 1369.3
  Top Layer w10: U3.14@7043.86,4693.07 7105.16,4693.07 7115,4683.23 v2(7115,4680) ; v2(7115,4493.23) 7326.77,4493.23 7515.16,4304.84 Q5.G@7515.16,3678.98
  Bottom Layer w10: v2(7115,4493.23) v2(7115,4680)
TMS_SWDIO: P8.2 U9.94 | length 591.7
  Top Layer w10: U9.94@9738.11,3729.8 9738.11,3646.89 9885,3500 10080,3500 P8.2@10155,3425
USBD_N: R43.1 U12.9 | length 364.8
  Top Layer w15: U12.9@10380,3835 10380,3877.5 10407.5,3905 R43.1@10690.94,3905
USBD_P: R44.2 U12.8 | length 369
  Top Layer w15: U12.8@10380,4040 10380,3997.5 10417.5,3960 R44.2@10690.94,3960
USBData_N: C48.2 R43.2 U11.2 | length 281
  Top Layer w15: C48.2@10750,3835 R43.2@10750,3905 10771.28,3905 10785.69,3919.41 U11.2@10955,3919.41
USBData_P: C47.2 R44.1 U11.3 | length 281.2
  Top Layer w15: C47.2@10750,4030 R44.1@10750,3960 10771.28,3960 10786.28,3945 U11.3@10955,3945
Vbat: C1.2 C2.2 C13.2 C14.2 C44.2 L3.1 L4.1 P1.2 P1.4 P1.6 P1.8 P1.10 P1.12 P1.14 P1.16 P1.18 P1.20 P5.4 Q1.D Q5.D R2.2 R13.2 R22.2 R29.2 R46.2 U1.21 U3.21 U5.27 U7.27 U10.1 V1.1 | length 3582
  Top Layer w10: R2.2@5020,4469.53 5075.47,4469.53 v2(5080,4465) ; C2.2@5093.15,5010 v1(5155,5010) ; U1.21@5155,4830.59 5235.59,4830.59 v7@5235,4831.18 ; Q1.D@5660,3185 5700,3225 Q1.D@5730,3195 ; R13.2@6885,4507.76 6940.47,4507.76 v2(6945,4503.23) ; C14.2@6983.15,5048.23 v1(7045,5048.23) ; U3.21@7045,4868.82 7125,4868.82 v3(7125,4875) ; C44.2@8570,3160 8570,3210 U10.1@8655,3295 ; P1.18@8665,4240 P1.18@8670,4245 8675,4250 R46.2@9070.94,4250
  Top Layer w20: v1(5650,3095) 5650,3175 5660,3185 Q1.D@5660,3250 ; Q1.D@5730,3260 5730,3195 5740,3185 v1(5740,3090) ; v1(5840,3830) 5840,3881.85 C1.2@5850,3891.85 ; v1(7425,3975) C13.2@7425,4046.85
  Top Layer w50: v4(7340,3210) Q5.D@7340,3355 ; v4(7420,3205) Q5.D@7420,3350 ; v4(7505,3205) Q5.D@7505,3350
  Battery Voltage w10: v4(7340,3210) v4@7345,3205
  Battery Voltage w30: v4@7345,3205 v4(7420,3205) v4(7505,3205) ; 8675,5010 8820,5010 8890,4940 9820,4940 P5.4@9990,5110
  other v1: 3360,2915 3460,2915 3415,4035 3515,4035
  other v7: 5235,4835
VCORE: C42.2 C43.2 L5.2 U9.12 | length 621.7
  Top Layer w10: U9.12@9920.2,4010.31 10006.55,4010.31 10078.72,3938.15 C42.2@10125,3938.15 10126.85,3940 C43.2@10220,3940 10250,3940 10305,3995 10305,4045 10245,4105 L5.2@10196.42,4105
VSW: L5.1 U9.14 | length 226.3
  Top Layer w10: U9.14@9920.2,4049.68 10068.27,4049.68 L5.1@10123.58,4105
pads on no net: J1.0 J2.0 J3.0 J4.0 J4.1 J5.0 Q9.2 Q9.3 U2.2 U2.3 U2.6 U2.7 U4.2 U4.3 U4.6 U4.7 U6.2 U6.3 U6.6 U6.7 U8.2 U8.3 U8.5 U8.6 U8.7 U11.0 U11.4 U12.2 U12.6 U12.7 U12.14 U12.15 U12.16 V1.2 V1.32 V1.33 V1.34

## Polygon pours and split planes (outlines as drawn)
NetC22_1 on Top Layer "NetC22_1-TopLayer" (solid, pour order 53): 6795,3229.25 6895,3110 7240,3110 7270,3140 7270,3560 7380,3630 7380,3740 7335,3785 7335,4045 7220,4160 6840,4160 6795,4111.48
NetC20_1 on Top Layer "NetC20_1-TopLayer" (solid, pour order 51): 6290,3150 6330,3110 6665.53,3110 6755,3215.92 6755,4120 6715,4160 6395,4160 6290,4060 6290,3655
NetD9_A on Top Layer "NetD9_A-TopLayer" (solid, pour order 49): 6440,4360 6475.71,4410 7305,4410 7340,4380.83 7340,4210 7315,4185 6490,4185 6440,4235
NetC23_2 on Top Layer "NetC23_2-TopLayer" (solid, pour order 47): 5915,4410 6015,4485 6227.5,4485 6265,4435 6265,3160 6215,3110 5965,3110 5915,3160
NetC10_1 on Top Layer "NetC10_1-TopLayer" (solid, pour order 45): 5170,3970 5200,3995 5670,3995 5700,3965 5700,3565 5550,3415 5550,3120 5485,3055 5205,3055 5175,3090
NetC8_1 on Top Layer "NetC8_1-TopLayer" (solid, pour order 43): 4739.17,3055 4700,3080 4700,3900 4795,3995 5102.22,3995 5150,3952 5150,3090 5110,3055
NetC11_2 on Top Layer "NetC11_2-TopLayer" (solid, pour order 41): 4425,3055 4315,3146.67 4315,4405 4375,4455 4590,4455 4675,4370 4675,3080 4637.5,3055
NetD4_A on Top Layer "NetD4_A-TopLayer" (solid, pour order 39): 4715,4235 4765,4285 5665,4285 5715,4235 5715,4035 5690,4010 4765,4010 4715,4060
NetD11_1 on Top Layer "NETD11_1_L01_P022" (solid, pour order 22): 3315,4415 3265,4465 3265,4610 3315,4660 3565,4660 3620,4605 3775,4605 3795,4625 3910,4625 3935,4600 4180,4600 4200,4580 4200,4460 4175,4435 4070,4435 3955,4550 3800,4550 3790,4560 3700,4560 3555,4415
GND on Top Layer "Top Layer-GND2" (solid, pour order 24): 3740,4545 3745,4550 3780,4550 3790,4540 3945,4540 3965,4520 3965,4425 3950,4410 3765,4410 3740,4435
NetC28_2 on Top Layer "NETC28_2_L01_P028" (solid, pour order 28): 3740,4360 3765,4385 4165,4385 4190,4360 4190,4260 4165,4235 3765,4235 3740,4260
GND on Top Layer "Top Layer-GND1" (solid, pour order 26): 3780,4695 3785,4690 3785,4675 3780,4670 3745,4670 3740,4665 3740,4655 3745,4650 3780,4650 3795,4635 3915,4635 3935,4615 3975,4615 3980,4610 4030,4610 4035,4615 4035,4640 4030,4645 3975,4645 3970,4650 3928.03,4650 3920,4658.03 3920,4715 3915,4720 3840,4720 3835,4725 3835,4810 3820,4825 3715,4825 3705,4835 3705,5020 3695,5030 3635,5030 3625,5020 3625,4770 3645,4750 3735,4750 3740,4745 3740,4695
GND on Top Layer "Top Layer-GND3" (solid, pour order 30): 4025,4855 4040,4870 4105,4870 4115,4880 4115,4955 4125,4965 4180,4965 4190,4955 4190,4785 4180,4775 4040,4775 4025,4790
Vbat on Top Layer "Top Layer-Vbat" (solid, pour order 32): 3265,4235 3290,4260 3590,4260 3710,4140 4145,4140 4265,4260 4265,4685 4230,4720 4003.75,4720 3972.5,4695 3930,4695 3930,4710 3970,4710 4025,4765 4265,4765 4290,4740 4290,4205 4070,3985 3290,3985 3265,4010
NetC28_2 on Top Layer "NETC28_2_L01_P034" (solid, pour order 34): 4025,5070 4051.87,5043.13 4051.87,4996.87 4030,4975 3926.87,4975 3921.87,4980 3921.87,5020 3978.74,5070
NetC32_2 on Top Layer "NETC32_2_L01_P035" (solid, pour order 35): 3970,3950 3996.87,3923.13 3996.87,3876.87 3975,3855 3871.87,3855 3866.87,3860 3866.87,3900 3923.74,3950
Vbat on Top Layer "Top Layer-Vbat" (solid, pour order 33): 3210,3115 3235,3140 3535,3140 3655,3020 4090,3020 4210,3140 4210,3565 4175,3600 3948.75,3600 3917.5,3575 3875,3575 3875,3590 3915,3590 3970,3645 4210,3645 4235,3620 4235,3085 4015,2865 3235,2865 3210,2890
GND on Top Layer "Top Layer-GND3" (solid, pour order 31): 3970,3735 3985,3750 4050,3750 4060,3760 4060,3835 4070,3845 4125,3845 4135,3835 4135,3665 4125,3655 3985,3655 3970,3670
GND on Top Layer "Top Layer-GND1" (solid, pour order 27): 3725,3575 3730,3570 3730,3555 3725,3550 3690,3550 3685,3545 3685,3535 3690,3530 3725,3530 3740,3515 3865,3515 3885,3495 3920,3495 3925,3490 3975,3490 3980,3495 3980,3520 3975,3525 3915,3525 3905,3535 3868.03,3535 3865,3538.03 3865,3595 3860,3600 3785,3600 3780,3605 3780,3690 3765,3705 3660,3705 3650,3715 3650,3900 3640,3910 3580,3910 3570,3900 3570,3650 3590,3630 3680,3630 3685,3625 3685,3575
NetC32_2 on Top Layer "NETC32_2_L01_P029" (solid, pour order 29): 3685,3240 3710,3265 4110,3265 4135,3240 4135,3140 4110,3115 3710,3115 3685,3140
GND on Top Layer "Top Layer-GND2" (solid, pour order 25): 3685,3425 3690,3430 3720,3430 3735,3420 3890,3420 3910,3400 3910,3305 3895,3290 3710,3290 3685,3315
NetD12_1 on Top Layer "NETD12_1_L01_P004" (solid, pour order 23): 3260,3295 3210,3345 3210,3490 3260,3540 3510,3540 3565,3485 3720,3485 3740,3505 3860,3505 3885,3480 4125,3480 4145,3460 4145,3340 4120,3315 4015,3315 3900,3430 3740,3430 3730,3440 3645,3440 3500,3295
NetC32_2 on Bottom Layer "NetC32_2-BottomLayer" (solid, pour order 55): 3835,3140 3835,3860 3925,3950 3970,3950 4000,3920 4000,3340 4305,3035 4305,2970 4280,2945 4030,2945
NetC28_2 on Bottom Layer "NetC28_2-BottomLayer" (solid, pour order 57): 3890,4260 3890,4980 3980,5070 4025,5070 4055,5040 4055,4460 4295,4220 4295,4035 4235,3975 4175,3975
3V3 on Battery Voltage "3V3" (solid, pour order 61): 9185.42,4710 8955,4497.31 8955,3540 8785,3370 8785,3235 8955,3065 10610,3065 11000,3455 11000,4520.41 10814.2,4710
Vbat on Battery Voltage "Vbat" (solid, pour order 59): 8710,4040 8710,3155 8330,2775 3355,2775 3240,2890 3240,4685 3720.01,5165.01 8715,5165 8815,5065 8815,4145
GND on Ground "GND-GND" (solid, pour order 63): 3120,5165 11105,5165 11105,2250 3120,2250

## Keep-outs
Keep-Out Layer:
  the board outline again, w10

## Other copper
Top Layer:
  region net GND: 4795,4695 4795,4665 4815,4655 4831.67,4645 4925,4645 4925,4710 4828.75,4710
  region net GND: 6687.5,4737.5 6687.5,4707.5 6707.5,4697.5 6732.5,4682.5 6817.5,4682.5 6817.5,4755 6726.87,4755

## Silkscreen, mask and mechanical layers (free items; w line width, h text height)
Top Overlay:
  text "48V" at 3735,4155 h30
  text "12V" at 8180,3780 h30
  text "19V" at 7275,3040 h30
  text "48V" at 3680,3035 h30
  text "48V" at 3680,3035 h30
  text "9V" at 5425,3005 h30
  text "12V" at 8120,2820 h30
  text "12V" at 7771.06,2540 h30
  text "19V" at 6305,2500 h30
  text "9V" at 5405,2405 h30
  text "48V" at 4200,2390 h30
Bottom Overlay:
  text "CU Boulder RoboSub / Power/Embedded System Board Rev 3" at 10430,2460 h60

## Text inside footprints (layer, text, board x,y; h text height)
D1: Top Overlay "A" at 5489.45,4987.8 h31.5 r180; Top Overlay "K" at 5442.2,4987.8 h31.5 r180
D2: Top Overlay "K" at 5522.2,4612.2 h31.5 r270; Top Overlay "A" at 5522.2,4659.45 h31.5 r270
D4: Top Overlay "K" at 5595.39,3926.3 h60 r270; Top Overlay "A" at 5595.39,4036.54 h60 r270
D5: Top Overlay "K" at 4616.3,3189.61 h60 r180; Top Overlay "A" at 4726.54,3189.61 h60 r180
D6: Top Overlay "A" at 7379.45,5026.02 h31.5 r180; Top Overlay "K" at 7332.2,5026.02 h31.5 r180
D7: Top Overlay "K" at 7412.2,4650.43 h31.5 r270; Top Overlay "A" at 7412.2,4697.68 h31.5 r270
D9: Top Overlay "K" at 7210.39,4082.83 h60 r270; Top Overlay "A" at 7210.39,4193.07 h60 r270